# Altium PCB IRF9540NS IRFZ44 P+N CHAN.PcbDoc
Units mil, origin at the board's own origin, x right, y up, seen from the top; angles counter-clockwise.
Board outline 3800 x 2275 mil, 2 copper layers (Top Layer, Bottom Layer); 51 components, 25 nets, 126 pads, 86 vias.
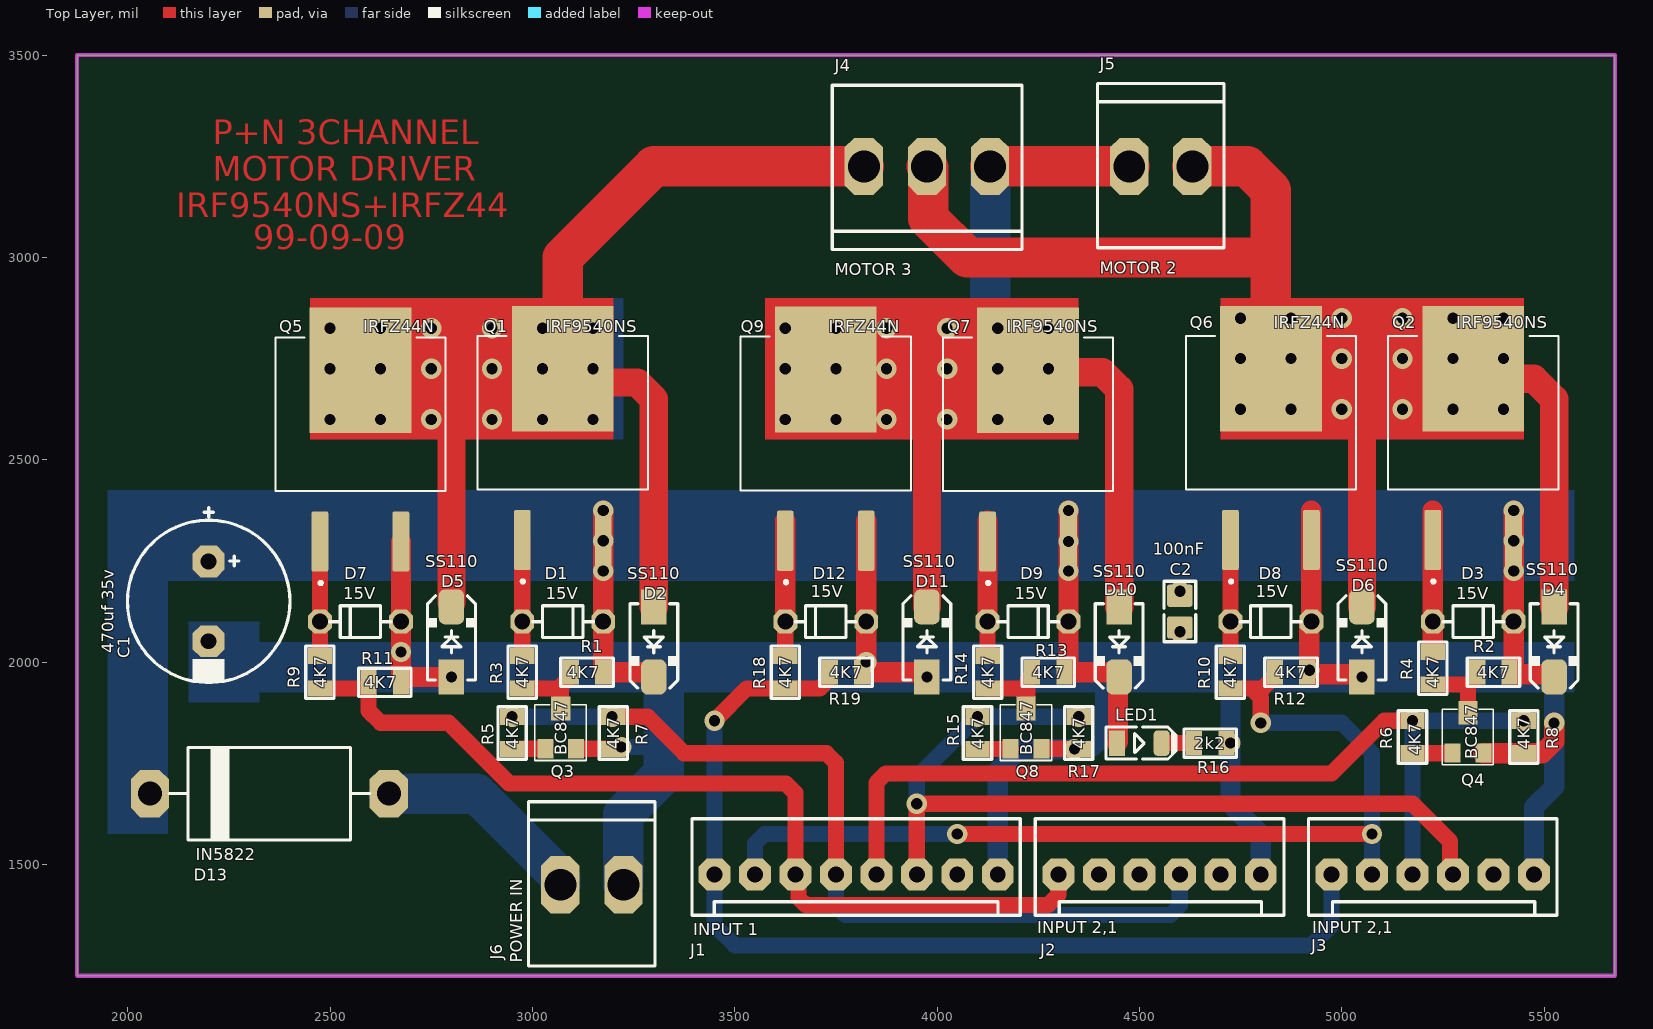
[diagram p0: Top Layer view]
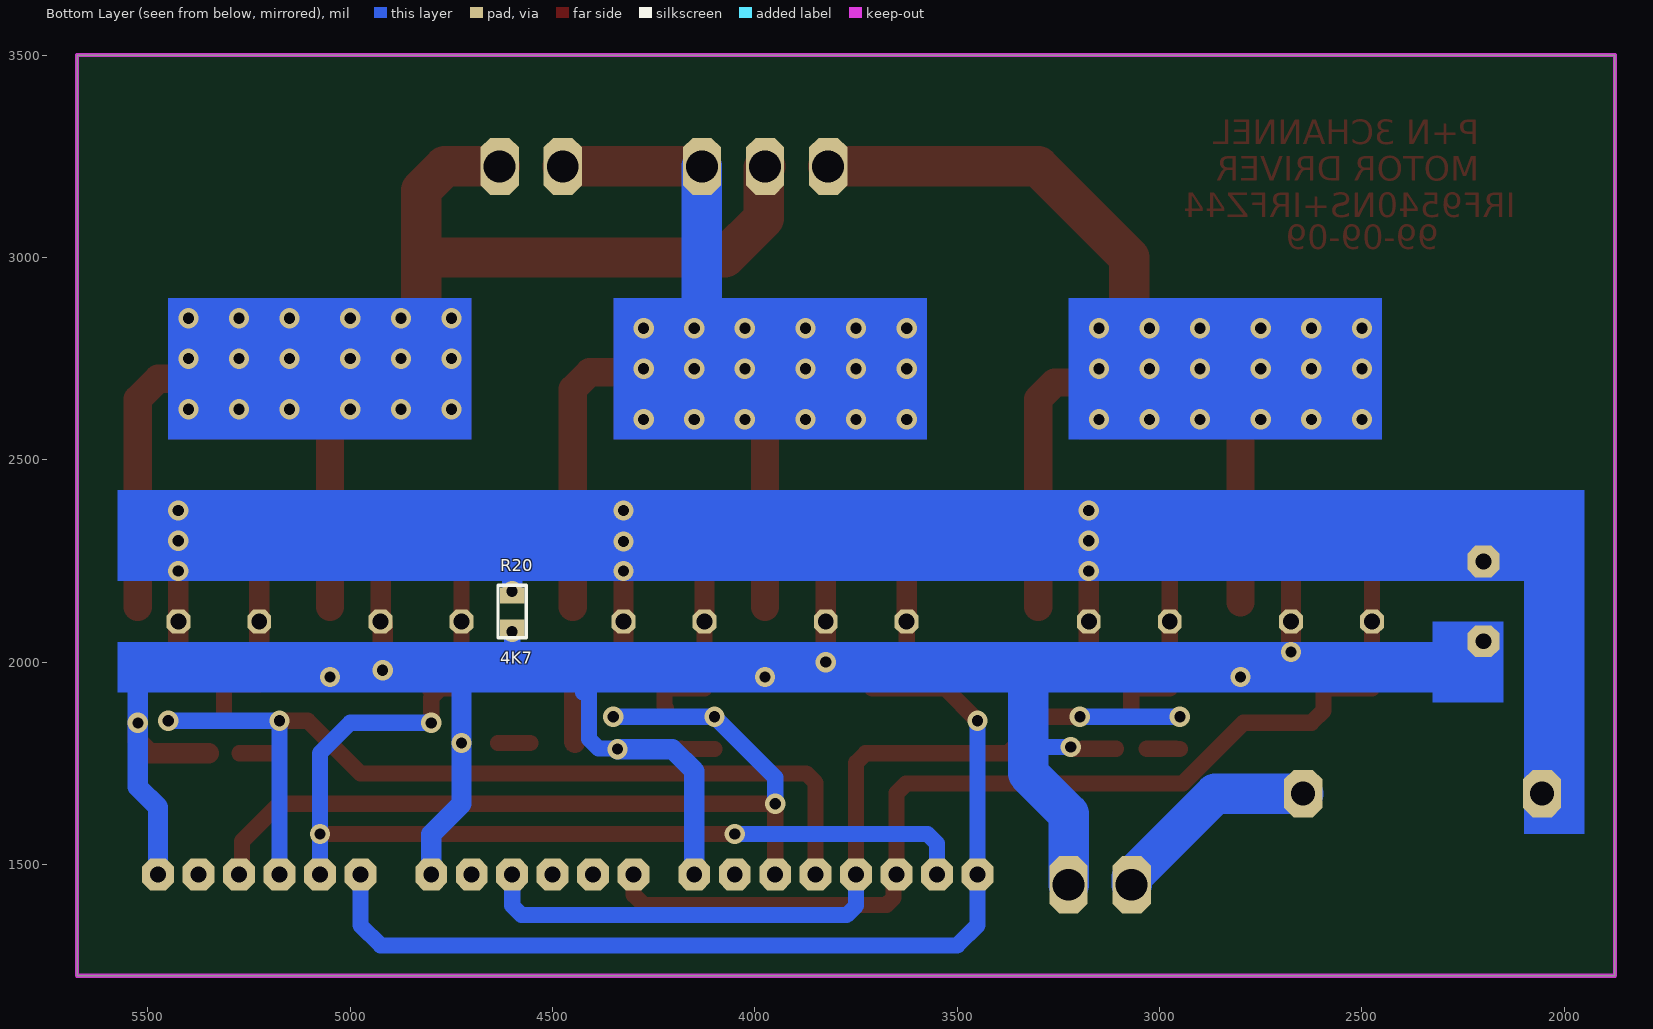
[diagram p1: Bottom Layer view, seen from below]
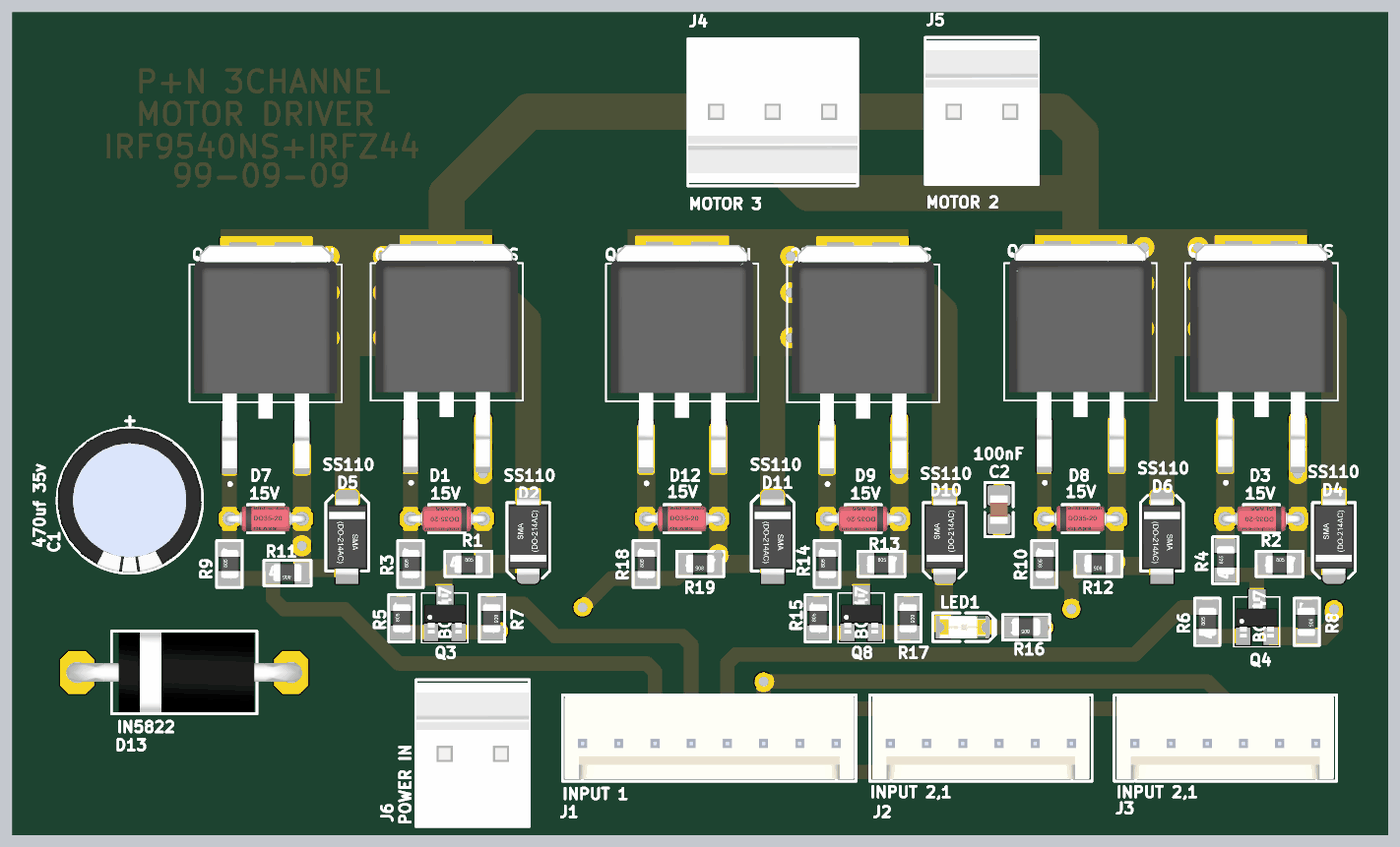
[diagram p2: 3D render of the assembled board from above, using the file's embedded part models]

## Layer stack, top to bottom
Top Solder: solder mask 0.4, Solder Resist, Dk 3.5
Top Layer: signal copper 1.4
Dielectric 1: dielectric 12.6, FR-4, Dk 4.8
Bottom Layer: signal copper 1.4
Bottom Solder: solder mask 0.4, Solder Resist, Dk 3.5

## Board outline
1875,1225 5675,1225 5675,3500 1875,3500

## Design rules (kind name [scope] priority, off if disabled: settings)
Clearance [All] p1: gap=10 ignorepadtopadclearanceinfootprint=FALSE except(0: Arc-Hole Track-Hole SMDPad-Hole THPad-Hole Via-Hole Fill-Hole Poly-Hole Region-Hole Text-Hole)
PolygonConnect [All] p1: connectstyle=Relief reliefconductorwidth=10 reliefentries=4 polygonreliefangle="90 Angle" airgapwidth=10
RoutingVias [All] p1: holewidth=28 width=50 viastyle="Through Hole" minholewidth=28 minwidth=50 maxholewidth=28 maxwidth=50
SolderMaskExpansion [All] p1: expansion=4 istentingtop=FALSE
Width [All] p1: maxlimit=100 minlimit=30 preferedwidth=50 minimp=50.000000 maximp=50.000000 favimp=50.000000
30 further rules are at their usual default settings.

## Components (designator, comment, footprint, x,y, rotation, side; value= is the part's Value field where it differs from the comment)
C1 "470uf 35v" C_EL_10X12 2200,2150 r270 top
C2 "100nF" C0805E 4600,2125 r90 top
D1 "15V" D_AX02_DO35 3075,2100 r0 top
D2 "SS110" D_SMA 3300,2050 r270 top
D3 "15V" D_AX02_DO35 5325,2100 r0 top
D4 "SS110" D_SMA 5525,2050 r270 top
D5 "SS110" D_SMA 2800,2050 r90 top
D6 "SS110" D_SMA 5050,2050 r90 top
D7 "15V" D_AX02_DO35 2575,2100 r180 top
D8 "15V" D_AX02_DO35 4825,2100 r180 top
D9 "15V" D_AX02_DO35 4225,2100 r0 top
D10 "SS110" D_SMA 4450,2050 r270 top
D11 "SS110" D_SMA 3975,2050 r90 top
D12 "15V" D_AX02_DO35 3725,2100 r180 top
D13 "IN5822" D_AX06_DO27 2350,1675 r180 top
J1 "INPUT 1" WF_8 3800,1475 r0 top value=HDRWF_8
J2 "INPUT 2,1" WF_6 4550,1475 r0 top value=HDRWF_6
J3 "INPUT 2,1" WF_6 5225,1475 r0 top value=HDRWF_6
J4 "MOTOR 3" PWL_3 3975,3225 r180 top
J5 "MOTOR 2" PWL_2 4552.95,3225 r0 top
J6 "POWER IN" PWL_2 3147.05,1450 r0 top
LED1 "" LED1206RED 4500,1800 r0 top
Q1 "IRF9540NS" DPAK2 3075,2553.74 r90 top
Q2 "IRF9540NS" DPAK2 5325,2553.74 r90 top
Q3 "BC847" SOT23 3032,1785.91 r0 top
Q4 "BC847" SOT23 5274,1775 r0 top
Q5 "IRFZ44N" DPAK2 2575,2550 r90 top
Q6 "IRFZ44N" DPAK2 4825,2553.74 r90 top
Q7 "IRF9540NS" DPAK2 4225,2550 r90 top
Q8 "BC847" SOT23 4182,1785.91 r0 top
Q9 "IRFZ44N" DPAK2 3725,2551.97 r90 top
R1 "4K7" R0805 3135,1975 r270 top
R2 "4K7" R0805 5375,1975 r270 top
R3 "4K7" R0805 2975,1975 r0 top
R4 "4K7" R0805 5225,1985 r0 top
R5 "4K7" R0805 2950,1825 r0 top
R6 "4K7" R0805 5175,1815 r0 top
R7 "4K7" R0805 3200,1825 r180 top
R8 "4K7" R0805 5450,1815 r180 top
R9 "4K7" R0805 2475,1975 r0 top
R10 "4K7" R0805 4725,1975 r0 top
R11 "4K7" R0805 2635,1950 r90 top
R12 "4K7" R0805 4875,1975 r90 top
R13 "4K7" R0805 4275,1975 r270 top
R14 "4K7" R0805 4125,1975 r0 top
R15 "4K7" R0805 4100,1825 r0 top
R16 "2k2" R0805 4675,1800 r90 top
R17 "4K7" R0805 4350,1825 r180 top
R18 "4K7" R0805 3625,1975 r0 top
R19 "4K7" R0805 3775,1975 r90 top
R20 "4K7" R0805 4600,2125 r0 bottom

## Footprints (in the part's own frame and the unit in brackets; to place one, negate y for a bottom-side part, rotate by r counter-clockwise, add the part's x,y. Pads: shape width x height; smd on the part's side, far side on the other; paste and mask are expansions set on the pad)
C0805E [mm] "CHIP Capacitor, 2.0X1.3mm, 0805, EXPANDED PAD"
  rrect20% 1.4x1.6 smd mask+0.1: 1(-1,0) 2(1,0)
  Top Layer pour cut-out: -0.5,0.8 0.5,0.8 0.5,-0.8 -0.5,-0.8
  silkscreen extent -1.9,-1 1.9,1, body extent -1,-0.62 1,0.63, height 1
C_EL_10X12 [mm] "Cap Elec, D10.0X12.0H pitch: 5.0mm"
  oct 2x2 hole 1: 1(-2.5,0) 2(2.5,0)
  silkscreen extent -5.9,-5.1 5.1,5.1, body extent -5.07,-5.08 5.05,5.04, height 13.7
D_AX02_DO35 [mm] "DIODE 0.2 INCH SPACING DO-35, 1N4148"
  oct 1.5x1.5 hole 1: 1(-2.54,0) 2(2.54,0)
  silkscreen extent -1.91,-1 1.93,1, body extent -2.81,-0.9 2.81,0.9, height 1.82
D_AX06_DO27 [mm] "DIODE 0.6 INCH SPACING A-500 (Vishay)  DO201A DO-27 BYW98"
  oct 2.4x3 hole 1.5: 1(-7.5,0) 2(7.5,0)
  silkscreen extent -6.3,-3 6.3,2.9, body extent -8.28,-2.8 8.28,2.8, height 7.6
D_SMA [mm] "SMA Molded Diode, 2-Leads, Body 4.3x2.7mm, SOD-128"
  rect 2.2x1.6 smd: 1(-2.2,0)
  rrect50% 2.2x1.6 smd: 2(2.2,0)
  silkscreen extent -2.4,-1.5 2.9,1.5, body extent -2.75,-1.4 2.75,1.4, height 2.6
DPAK2 [mm]
  rrect25% 3.78x1.06 smd: 1(-6.4,2.54) 3(-6.4,-2.54)
  rect 7.88x6.39 smd paste-5: 2(4.35,0)
  silkscreen extent -9.1,-5.34 6.42,5.34, body extent -7.87,-5 7.75,5, height 5.08
LED1206RED [mm] "LED, 1206, RED"
  rect 1x1.6 smd mask+0.075: 1(-1.4,0)
  rrect50% 1x1.6 smd mask+0.075: 2(1.4,0)
  Top Layer pour cut-out: -1.1,1.1 -1.1,-1.1 1.1,-1.1 1.1,1.1
  silkscreen extent -2.1,-1 2.3,1, body extent -1.6,-0.8 1.6,0.8, height 0.68
PWL_2 [mm] "Connector; Header; 2 Position"
  oct 2.4x3.6 hole 2: 1(-1.98,0) 2(1.98,0)
  silkscreen extent -3.98,-5.1 3.96,5.21, body extent -3.96,-5 3.96,5, height 13.5
PWL_3 [mm] "Connector; Header; 3 Position"
  oct 2.4x3.6 hole 2: 1(-3.96,0) 2(0,0) 3(3.96,0)
  silkscreen extent -5.96,-5.1 5.94,5.21, body extent -5.94,-5 5.94,5, height 13.5
R0805 [mil]
  rect 60x40 smd: 1(0,40) 2(0,-40)
  silkscreen extent -35,-65 35,65, body extent -24,-39 26,39, height 31
SOT23 [mm]
  rect 1x1.2 smd: 1(0,0) 2(1.93,0)
  rect 1.2x1.5 smd: 3(0.965,2.54)
  silkscreen extent -0.66,-0.74 2.57,2.77, body extent -0.48,-0.08 2.42,2.72
WF_6 [mm] "DS1070  WF, Cvilux CI31 pitch 2.54mm"
  oct 2x2 hole 1: 1(-6.35,0) 2(-3.81,0) 3(-1.27,0) 4(1.27,0) 5(3.81,0) 6(6.35,0)
  silkscreen extent -7.8,-2.55 7.8,3.5, body extent -7.62,-2.4 7.62,3.4, height 11.56
WF_8 [mm] "DS1070  WF, Cvilux CI31 pitch 2.54mm"
  oct 2x2 hole 1: 1(-8.89,0) 2(-6.35,0) 3(-3.81,0) 4(-1.27,0) 5(1.27,0) 6(3.81,0) 7(6.35,0) 8(8.89,0)
  silkscreen extent -10.3,-2.55 10.3,3.5, body extent -10.16,-2.4 10.16,3.4, height 11.56

## Part data
C1: library part CAP3528
C2: library part C
D1 D3 D7 D8 D9 D12: library part ZENER, "DIODE, ZENER, 3W, 5.6V", ASSEMBLY=ASSEMBLY, DESC=DESCRIPTION, MANF=MCC, MANF_P#=3SMAJ5919B-TP, PARAM=5.6V, PARAM2="0.5W, 2Ohm, 67mA, -55~150oC", Price=0.5$
D2 D4 D5 D6 D10 D11: library part SCHOTTKY, "DIODE, SCHOTTKY, 40V, 1A", ASSEMBLY=ASSEMBLY, DESC=DESCRIPTION, MANF=DIODES, MANF_P#=1N5819HW-7-F, PARAM=40V, PARAM2=1A, Price=PRICE
D13: library part "Diode 1N4005", "1 Amp General Purpose Rectifier", Code_JEDEC=DO-204-AL, ComponentLink1Description="Manufacturer Link", ComponentLink1URL=http://www.fairchildsemi.com/, ComponentLink2Description=Datasheet, ComponentLink2URL=http://www.fairchildsemi.com/ds/1N%2F1N4001.pdf, DatasheetVersion=1998, LatestRevisionDate=17-Jul-2002, LatestRevisionNote="Re-released for DXP Platform.", PackageDescription="Diode, Axial; Body 5.2 x 2.7 mm (LxDia. max), Lead Dia. 0.86 mm (max)", PackageReference=DO-41, PackageVersion=Aug-1999, Published=8-Jun-2000, Publisher="Altium Limited"
J1: library part HDRWF_8, "Header, WF, Pitch: 2.54mm"
J2 J3: library part HDRWF_6, "Header, WF, Pitch: 2.54mm"
J4: library part "sip 3", "WR-PHD Pin Header, THT, pitch 2.54mm, Single Row, Vertical, 3pin", Contact Resistance=20mOhm, Operating Temperature="-40 to +105degC", Part Number=61300311121, Rated Current=3A, Withstanding Voltage=500VAC, Working Voltage=250VAC, ComponentLink1Description=Manufacturer, ComponentLink1URL=http://www.we-online.de, ComponentLink2Description=Datasheet, ComponentLink2URL=https://katalog.we-online.de/em/datasheet/6130xx11121.pdf, Gender=Male, Mounting Technology=THT, Orientation=Vertical, Packaging=Bag, Pin Number=3, Pitch=2.54mm, Published Date="June 2019", Publisher="Wurth Elektronik", Row Number=Single
J5 J6: library part "sip 2", "WR-PHD Pin Header, THT, pitch 2.54mm, Single Row, Vertical, 2pin", Contact Resistance=20mOhm, Operating Temperature="-40 to +105degC", Part Number=61300211121, Rated Current=3A, Withstanding Voltage=500VAC, Working Voltage=250VAC, ComponentLink1Description=Manufacturer, ComponentLink1URL=http://www.we-online.de, ComponentLink2Description=Datasheet, ComponentLink2URL=https://katalog.we-online.de/em/datasheet/6130xx11121.pdf, Gender=Male, Mounting Technology=THT, Orientation=Vertical, Packaging=Bag, Pin Number=2, Pitch=2.54mm, Published Date="June 2019", Publisher="Wurth Elektronik", Row Number=Single
LED1: library part LED3mm
Q1 Q2 Q7: library part IRF9540NSTRLPBF, "RoHS Compliant", Package="D2PAK Infineon", Availability=Unavailable, MF=Infineon, MP=IRF9540NSTRLPBF, Price=None, SnapEDA_Link=https://www.snapeda.com/parts/IRF9540NSTRLPBF/Infineon%20Technologies/view-part/565416/?ref=snap
Q3 Q4 Q8: library part NPN_BC847_SOT23, "BJT, NPN, 45v, 0.1A, SOT23", MANF=NXP, MANF_P#=BC847, PARAM="0.1A, Hfe110~800", PARAM2="45v, 500mW"
Q5 Q6 Q9: library part IRFZ44NPBF, "RoHS Compliant", Package="TO-220 Infineon", Availability=Unavailable, MF=Infineon, MP=IRFZ44NPBF, Price=None, SnapEDA_Link=https://www.snapeda.com/parts/IRFZ44NPBF/Infineon%20Technologies/view-part/1662576/?ref=snap
R1 R2 R3 R4 R5 R6 R7 R8 R9 R10 R11 R12 R13 R14 R15 R16 R17 R18 R19 R20: library part R

## Via types
v1: diameter 50, hole 27.56, Top Layer to Bottom Layer, 86 vias

## Nets (pads, with @x,y where several pads share a name; then routed paths per layer and width w, separated by ;. In a path a pad name is that pad's centre, name@x,y a point inside that pad or via, vN(x,y) a via of type N, cw(c..) or ccw(c..) an arc to the next point about the centre after c; other vN are vias at no path point)
24V: C1.1 C2.2 D1.2 D2.2 D3.2 D4.2 D9.2 D10.2 D13.2 LED1.1 Q1.3 Q2.3 Q7.3 R1.1 R2.1 R13.1 R20.2 | length 1887.1
  Top Layer w50: v1(3175,2375) Q1.3 v1(3175,2225) D1.2 R1.1 3293.5,1975 3300,1968.5 D2.2 ; v1(4325,2375) v1(4325,2298.03) v1(4325,2225) D9.2 4325,1995.47 4320,1990.47 4320,1975 4443.5,1975 4450,1968.5 D10.2 4447.44,1960.83 4447.44,1802.56 LED1.1 ; R2.1@5420,1970 5518.5,1970 5525,1963.5 D4.2 5525,1956.5 D4.2@5518.5,1950 ; R2.1@5425,1975 D3.2 v1(5425,2225) v1(5425,2300) Q2.3 v1(5425,2375)
  Bottom Layer w50: v1(4600,2175) 4600,2300
  other v1: 3175,2300
+19R: D13.1 J6.1 | length 527.6
  Bottom Layer w100: D13.1 2862.2,1675 3069.09,1468.11 J6.1
GND: C1.2 C2.1 D5.1 D6.1 D7.1 D8.1 D11.1 D12.1 J1.8 J2.6 J3.6 J6.2 Q3.2 Q4.2 Q5.3 Q6.3 Q8.2 Q9.3 R7.1 R8.1 R11.2 R12.2 R16.2 R17.1 R19.2 R20.1 | length 4456.7
  Top Layer w40: Q3.2 3189.09,1785.91 3190,1785 R7.1 3214.68,1785 v1(3219.68,1790) ; Q8.2 4339.09,1785.91 v1(4340,1785) R17.1
  Top Layer w50: Q5.3 D7.1 v1(2675,2025) 2675,1975 R11.2@2682.5,1967.5 ; R11.2@2680,1955 2688.39,1963.39 v1(2800,1963.39) D5.1@2800,1975 ; R19.2@3820,1975 3968.5,1975 3975,1968.5 v1(3975,1963.39) ; R19.2@3825,1975 v1(3825,2000) ; Q9.3@3825,2350 Q9.3 D12.1 3825,2004.29 R19.2@3827.14,2002.14 ; Q6.3@4925,2375 Q6.3 4925,2099.88 4920,2094.88 4920,1970 5043.5,1970 5050,1963.5 v1(5050,1963.39) ; Q4.2 R8.1 5495.71,1775 5525,1804.29 v1(5525,1850)
  Bottom Layer w40: v1(3219.68,1790) 3220.26,1790.58 3325,1790.58 ; 3300,1852.29 3300,1900 ; v1(4340,1785) 4341.91,1786.91 4386.91,1786.91 4410.34,1810.34 4410.34,1920 4415.34,1925 4425,1925 ; 4600,2000 v1(4600,2075)
  Bottom Layer w50: J1.8 4150,1731.29 4203.71,1785 v1(4340,1785) ; 4725,1950 v1(4725,1800) 4725,1650 4800,1575 J2.6 ; J3.6 5475,1641.39 5525,1691.39 v1(5525,1850) 5525,1975
  Bottom Layer w100: J6.2 3225,1625 3325,1725 3325,1790.58 3325,1950
  other v1: 4920,1980
Motor-A: D10.1 D11.2 J4.1 J5.1 Q7.2 Q9.2 | length 2177.2
  Top Layer w50: Q7.2@4186.61,2759.65 Q7.2
  Top Layer w70: D11.2 3975,2725 ; Q7.2 4230.25,2716.01 4408.99,2716.01 4450,2675 D10.1
  Top Layer w100: J4.1 J5.1
  Bottom Layer w100: J4.1 4130.91,2844.09 v1(4150,2825)
  other v1: 3625,2600 3750,2600 3875,2600 4025,2600 4150,2600 4275,2600 3625,2725 3750,2725 3875,2725 4025,2725 4150,2725 4275,2725 3625,2825 3750,2825 3875,2825 4025,2825 4275,2825
Motor-B: D4.1 D6.2 J4.2 J5.2 Q2.2 Q6.2 | length 2959
  Top Layer w70: D6.2 5050,2675 ; Q2.2 5350,2700 5475,2700 5525,2650 D4.1
  Top Layer w100: J4.2 3977.76,3222.24 3977.76,3097.24 4075,3000 4825,3000 ; J5.2 4766.42,3225 4825,3166.42 4825,3000 ; Q6.2 4825,2750 4825,2850 4825,3000
  other v1: 4750,2625 4875,2625 5000,2625 5150,2625 5275,2625 5400,2625 4750,2750 4875,2750 5000,2750 5150,2750 5275,2750 5400,2750 4750,2850 4875,2850 5000,2850 5150,2850 5275,2850 5400,2850
Motor-C: D2.1 D5.2 J4.3 Q1.2 Q5.2 | length 2374.9
  Top Layer w50: Q1.2@3063.39,2736.61 Q1.2
  Top Layer w70: D5.2@2800,2148.23 2800,2625 ; Q1.2 3108.99,2691.01 3258.99,2691.01 3300,2650 D2.1
  Top Layer w100: Q1.2 3075,3000 3300,3225 J4.3
  other v1: 2500,2600 2625,2600 2750,2600 2900,2600 3025,2600 3150,2600 2500,2725 2625,2725 2750,2725 2900,2725 3025,2725 3150,2725 2500,2825 2625,2825 2750,2825 2900,2825 3025,2825 3150,2825
Motor-Direct1: J1.1 J3.1 R18.2 R19.1 | length 2539.9
  Top Layer w40: v1(3450,1855) 3530,1935 3710,1935 3735,1960 R19.1
  Bottom Layer w40: v1(3450,1855) J1.1 3450,1350 3500,1300 4925,1300 4975,1350 J3.1
Motor-Direct2: J1.2 J3.2 R10.2 R12.1 | length 2444.5
  Top Layer w40: v1(4050,1575) v1(5075,1575) ; R10.2 4776.57,1935 ; v1(4800,1850) 4800,1911.57 4776.57,1935 ; R12.1 4835,1965 4805,1935 4776.57,1935
  Bottom Layer w40: J1.2 3550,1551.57 3573.43,1575 v1(4050,1575) ; v1(4800,1850) 5000,1850 5075,1775 J3.2
Motor-Direct3: J1.3 J2.1 R9.2 R11.1 | length 2303.6
  Top Layer w40: R9.2 2590,1935 R11.1@2595,1940 ; R11.1 R11.1@2595,1940 ; J2.1 4300,1425 4275,1400 3675,1400 3657.41,1417.59 3657.41,1467.59 J1.3 3650,1676.57 3626.57,1700 2942.57,1700 2792.57,1850 2625,1850 2595,1880 R11.1@2595,1940
NetD1_1: D1.1 Q1.1 R3.1 | length 286.8
  Top Layer w40: R3.1 D1.1 Q1.1
NetD3_1: D3.1 Q2.1 R4.1 | length 350
  Top Layer w50: R4.1 D3.1 Q2.1 Q2.1@5225,2375
NetD7_2: D7.2 Q5.1 R9.1 | length 273
  Top Layer w40: R9.1@2475,2025 Q5.1
NetD8_2: D8.2 Q6.1 R10.1 | length 276.8
  Top Layer w40: R10.1@4725,2025 D8.2 Q6.1
NetD9_1: D9.1 Q7.1 R14.1 | length 325
  Top Layer w40: R14.1@4125,2025 D9.1
  Top Layer w50: D9.1 Q7.1 Q7.1@4125,2350
NetD12_2: D12.2 Q9.1 R18.1 | length 325
  Top Layer w40: R18.1@3625,2025 D12.2
  Top Layer w50: D12.2 Q9.1 Q9.1@3625,2350
NetLED1_2: LED1.2 R16.1 | length 79.9
  Top Layer w40: LED1.2 R16.1
NetQ3_1: Q3.1 R5.2 | length 82.4
  Top Layer w40: R5.2 2960,1785 2960.91,1785.91 Q3.1
NetQ3_3: Q3.3 R1.2 R3.2 | length 196.5
  Top Layer w40: R3.2 3065,1935 3070,1940 ; Q3.3 3070,1940 ; R1.2 3095,1965 3070,1940
NetQ4_1: Q4.1 R6.2 | length 79
  Top Layer w40: R6.2@5195,1775 Q4.1
NetQ4_3: Q4.3 R2.2 R4.2 | length 199.5
  Top Layer w40: R4.2 5309,1945 ; Q4.3 5312,1942 5309,1945 ; R2.2 5335,1965 5315,1945 5309,1945
NetQ8_1: Q8.1 R15.2 | length 82.7
  Top Layer w40: R15.2 4181.69,1785 4182,1785.31 Q8.1
NetQ8_3: Q8.3 R13.2 R14.2 | length 198.1
  Top Layer w40: R14.2 4213.62,1935 4223.62,1925 ; Q8.3 4223.62,1889.53 4223.62,1925 ; R13.2 4235,1965 4223.62,1953.62 4223.62,1925
PWMA: J1.6 J3.4 R15.1 R17.2 | length 2143.6
  Top Layer w40: J1.6 v1(3950,1650) 5175,1650 5267.59,1557.41 5267.59,1482.41 J3.4
  Bottom Layer w40: v1(3950,1650) 3950,1715 v1(4100,1865) v1(4350,1865)
PWMB: J1.5 J3.3 R6.1 R8.2 | length 2270.1
  Top Layer w40: J1.5 3850,1701.57 3873.43,1725 4975,1725 5105,1855 v1(5175,1855)
  Bottom Layer w40: J3.3 v1(5175,1855) v1(5450,1855)
PWMC: J1.4 J2.4 R5.1 R7.2 | length 2143.2
  Top Layer w40: R7.2 3285,1865 3375,1775 3726.57,1775 3750,1751.57 J1.4
  Bottom Layer w40: v1(2950,1865) v1(3197.09,1865) ; J1.4 3750,1398.43 3773.43,1375 4576.57,1375 4600,1398.43 J2.4
pads on no net: J1.7 J2.2 J2.3 J2.5 J3.5

## Keep-outs
Keep-Out Layer:
  the board outline again, w10

## Other copper
Top Layer:
  region net Motor-C: 3200,2550 3200,2900 2450,2900 2450,2550
  region net Motor-A: 4350,2550 4350,2900 3575,2900 3575,2550
  region net Motor-B: 5450,2550 5450,2900 4700,2900 4700,2550
  text "P+N 3CHANNEL" at 2210,3280.01 h60
  text "MOTOR DRIVER" at 2210,3190.01 h60
  text "IRF9540NS+IRFZ44" at 2120,3100.01 h60
  text "99-09-09" at 2310,3020.01 h60
Bottom Layer:
  region net Motor-B: 5450,2550 5450,2900 4700,2900 4700,2550
  region net Motor-A: 4350,2550 4350,2900 3575,2900 3575,2550
  region net Motor-C: 3225,2550 3225,2900 2450,2900 2450,2550
  region net 24V: 2100,1575 2100,2425 1950,2425 1950,1575
  region net GND: 2325,1900 2325,2100 2150,2100 2150,1900
  region net GND: 5575,1925 5575,2050 2150,2050 2150,1925
  region net 24V: 5575,2200 5575,2425 2000,2425 2000,2200